# EAGLE board Transceiver (EAGLE 5.00)
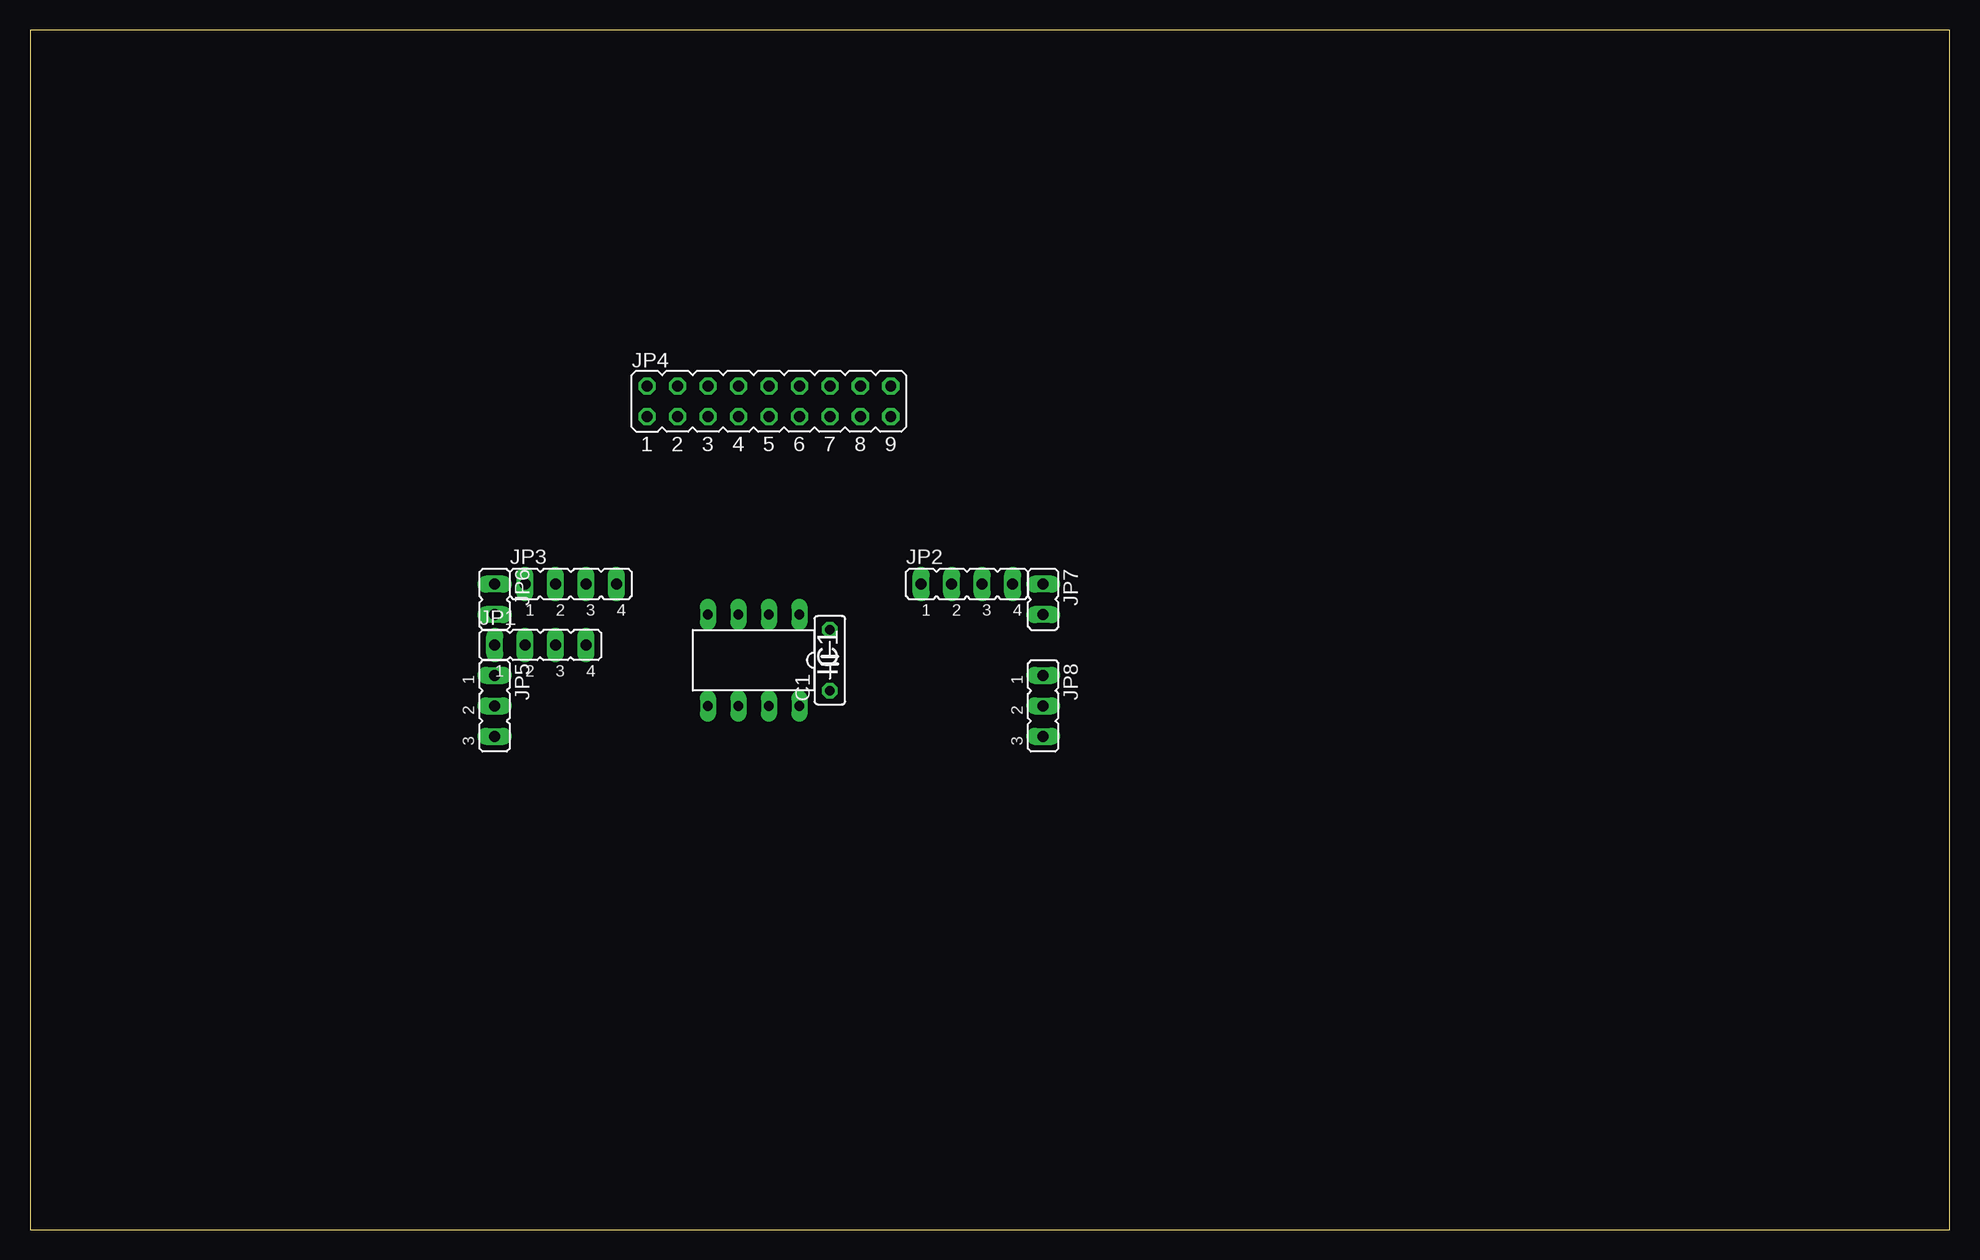
[diagram p0: board, top side]
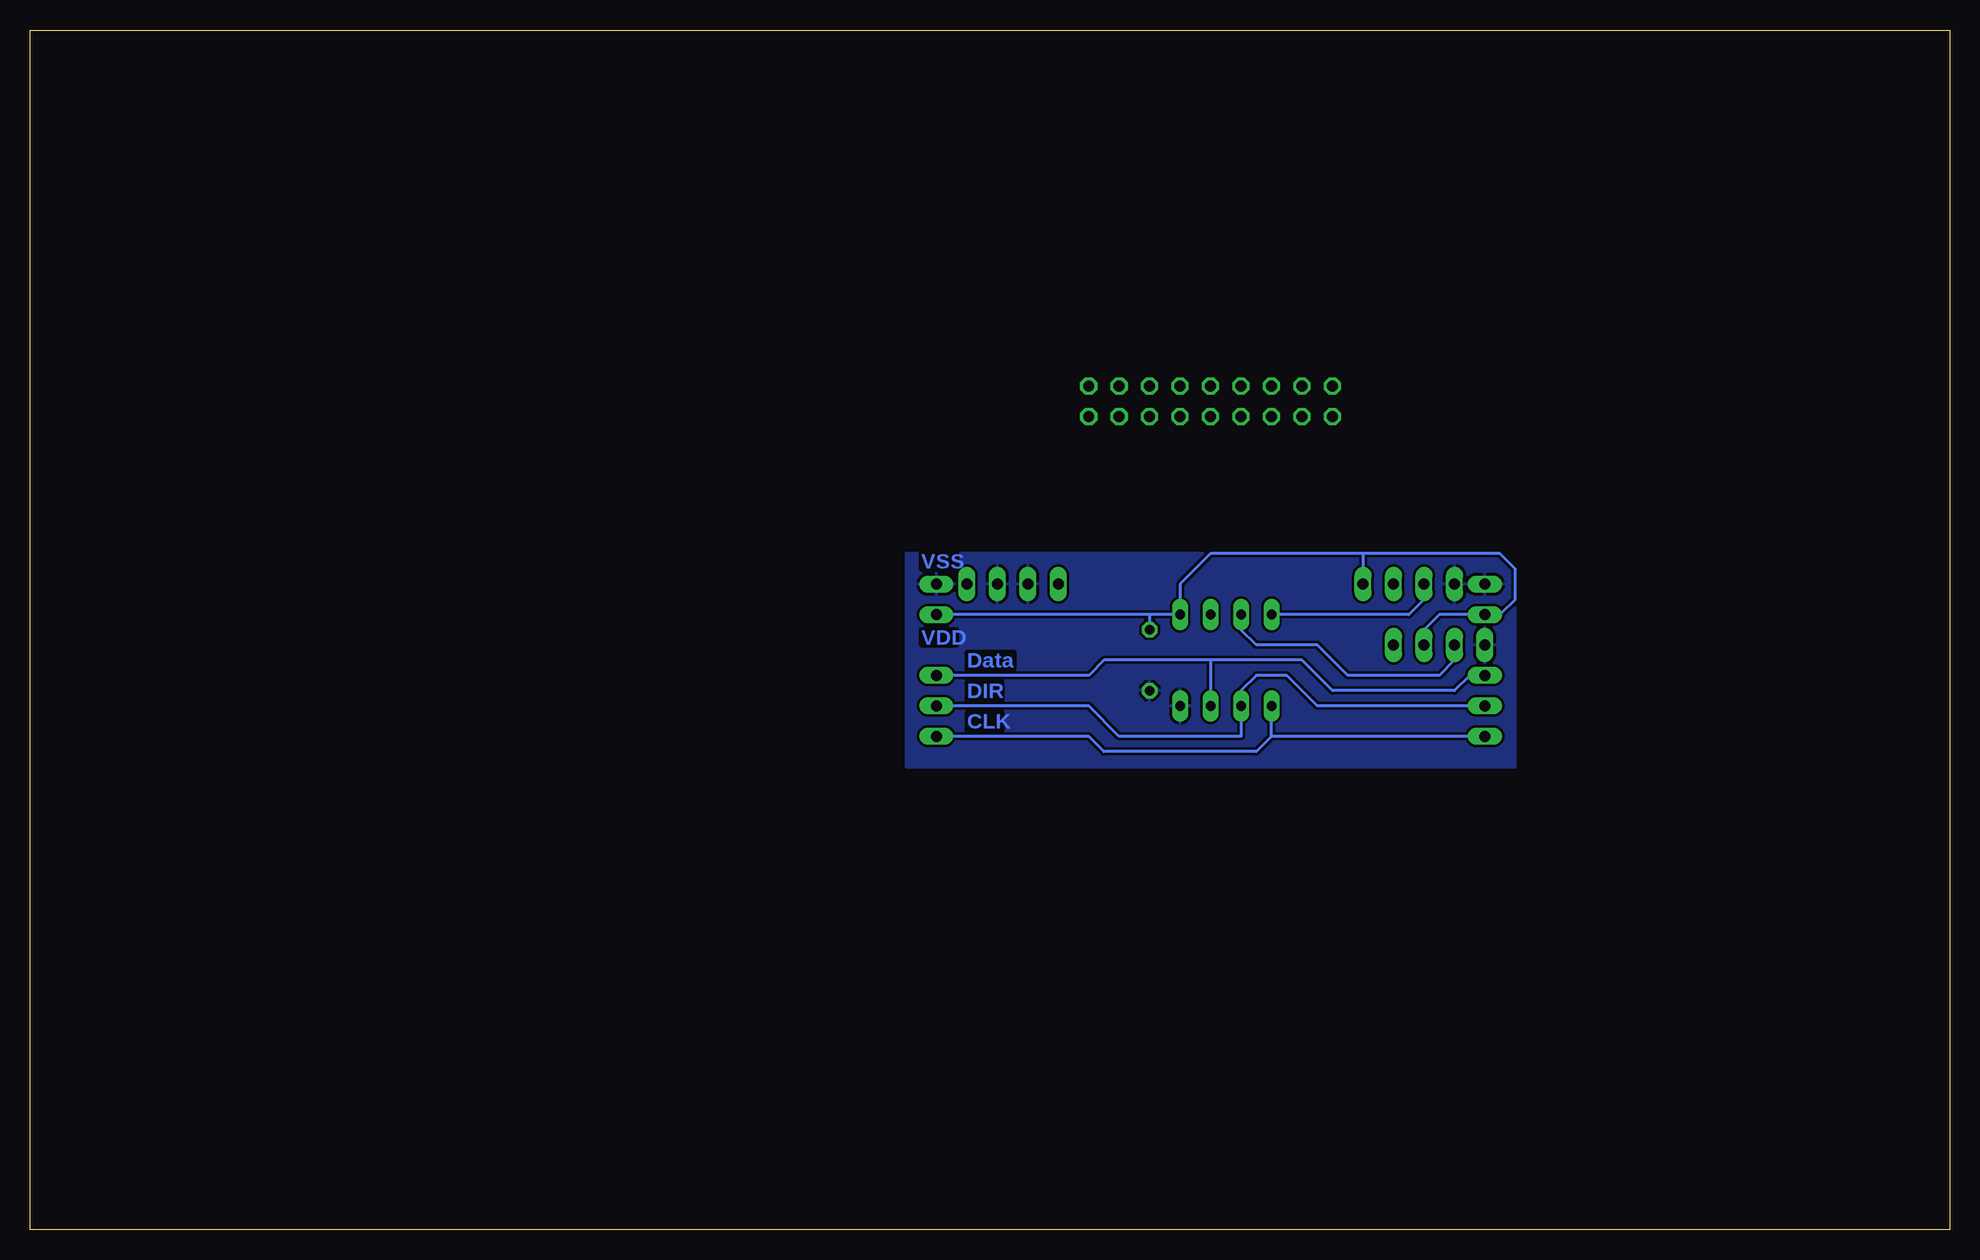
[diagram p1: board, bottom side, seen from below]

Size 160 x 100 mm. Coordinates in mm from the lower left corner, seen from the top.
Outline: 0,0 160,0 160,100 0,100 0,0
Copper layers (1*16): Top 0.035mm / dielectric 1.5mm / Bottom 0.035mm
Design rules "default": minimum track width 10mil, minimum drill 24mil, track to track 8mil, track to pad 8mil, pad to pad 8mil, via to via 8mil, smd to smd 8mil, copper to edge 40mil, drill to drill 8mil, minimum pad ring 10mil, minimum via ring 8mil, stop-mask expansion 4mil, vias tented up to drill 0mil, thermal gap 10mil

## Footprints (pad centres in the part's own frame; a part is rotated, then mirrored left to right if it is on the bottom)
C050-025X075 = drill 0.813 octagon: 1 -2.54,0; 2 2.54,0
DIL8 = drill 0.813 long: 1 -3.81,-3.81; 2 -1.27,-3.81; 3 1.27,-3.81; 4 3.81,-3.81; 5 3.81,3.81; 6 1.27,3.81; 7 -1.27,3.81; 8 -3.81,3.81
JP4 = drill 0.914 long: 1 -3.81,0; 2 -1.27,0; 3 1.27,0; 4 3.81,0
JP9Q = drill 0.914 octagon: 1 -10.16,-1.27; 2 -10.16,1.27; 3 -7.62,-1.27; 4 -7.62,1.27; 5 -5.08,-1.27; 6 -5.08,1.27; 7 -2.54,-1.27; 8 -2.54,1.27; 9 0,-1.27; 10 0,1.27; 11 2.54,-1.27; 12 2.54,1.27; 13 5.08,-1.27; 14 5.08,1.27; 15 7.62,-1.27; 16 7.62,1.27; 17 10.16,-1.27; 18 10.16,1.27
JP2 = drill 0.914 long: 1 -2.54,0; 2 0,0; 3 2.54,0
JP1 = drill 0.914 long: 1 0,-1.27; 2 0,1.27

## Placement (x,y rotation side)
C1  [C050-025X075]  66.67,47.46 90 top
IC1  PIC12F683P  [DIL8]  60.32,47.46 180 top
JP1  [JP4]  42.54,48.73 0 top
JP2  [JP4]  78.1,53.81 0 top
JP3  [JP4]  45.08,53.81 0 top
JP4  [JP9Q]  61.59,69.05 0 top
JP5  [JP2]  38.73,43.65 270 top
JP6  [JP1]  38.73,52.54 180 top
JP7  [JP1]  84.45,52.54 180 top
JP8  [JP2]  84.45,43.65 270 top

## Library data of the parts
C1 = rcl
IC1 = microchip-6
JP1-JP8 = jumper

## Nets
5V: C1.2 IC1.1 JP1.3 JP3.4 JP6.2 JP7.2
GND: C1.1 IC1.8 JP1.1 JP2.2 JP2.3 JP3.1 JP6.1 JP7.1
N$1: IC1.3 JP1.2
N$2: IC1.4 JP3.2
N$3: IC1.5 JP5.3 JP8.3
N$4: IC1.6 JP5.2 JP8.2
N$5: IC1.7 JP5.1 JP8.1
N$6: IC1.2
N$7: JP2.1
N$8: JP1.4

## Tracks (layer width: path | path; a pad name or v marks a point on that pad's centre or on a via)
5V
  Bottom 0.254: IC1.1 JP7.2 85.72,51.27 | 48.89,56.35 37.46,56.35 36.19,55.08 36.19,52.54 37.46,51.27 JP6.2 42.54,51.27 43.81,50 JP1.3 | 48.89,56.35 JP3.4 | 48.89,56.35 61.59,56.35 64.13,53.81 IC1.1 | IC1.1 66.67,51.27 C1.2
GND
  pour Bottom: 36.19,56.35 86.99,56.35 86.99,38.57 36.19,38.57
N$1
  Bottom 0.254: JP1.2 41.27,47.46 42.54,46.19 50.16,46.19 52.7,48.73 57.78,48.73 59.05,50 IC1.3
N$2
  Bottom 0.254: JP3.2 43.81,52.54 45.08,51.27 IC1.4
N$3
  Bottom 0.254: JP5.3 56.51,41.11 | JP8.3 71.75,41.11 70.48,39.84 57.78,39.84 56.51,41.11 | 56.51,41.11 IC1.5
N$4
  Bottom 0.254: JP5.2 52.7,43.65 55.24,46.19 57.78,46.19 59.05,44.92 IC1.6 59.05,41.11 69.21,41.11 71.75,43.65 JP8.2
N$5
  Bottom 0.254: JP5.1 40,46.19 41.27,44.92 51.43,44.92 53.97,47.46 61.59,47.46 | 61.59,47.46 IC1.7 | JP8.1 71.75,46.19 70.48,47.46 61.59,47.46

## Text on the board
Bottom: VSS | VDD | Data | DIR | CLK